# Altium PCB LoadMix.PcbDoc
Units mil, origin at the board's own origin, x right, y up, seen from the top; angles counter-clockwise.
Board outline 5010 x 5160 mil, 2 copper layers (Top Layer, Bottom Layer); 29 components, 11 nets, 56 pads, 0 vias.
Unrouted connection lines stored in the file: 5.
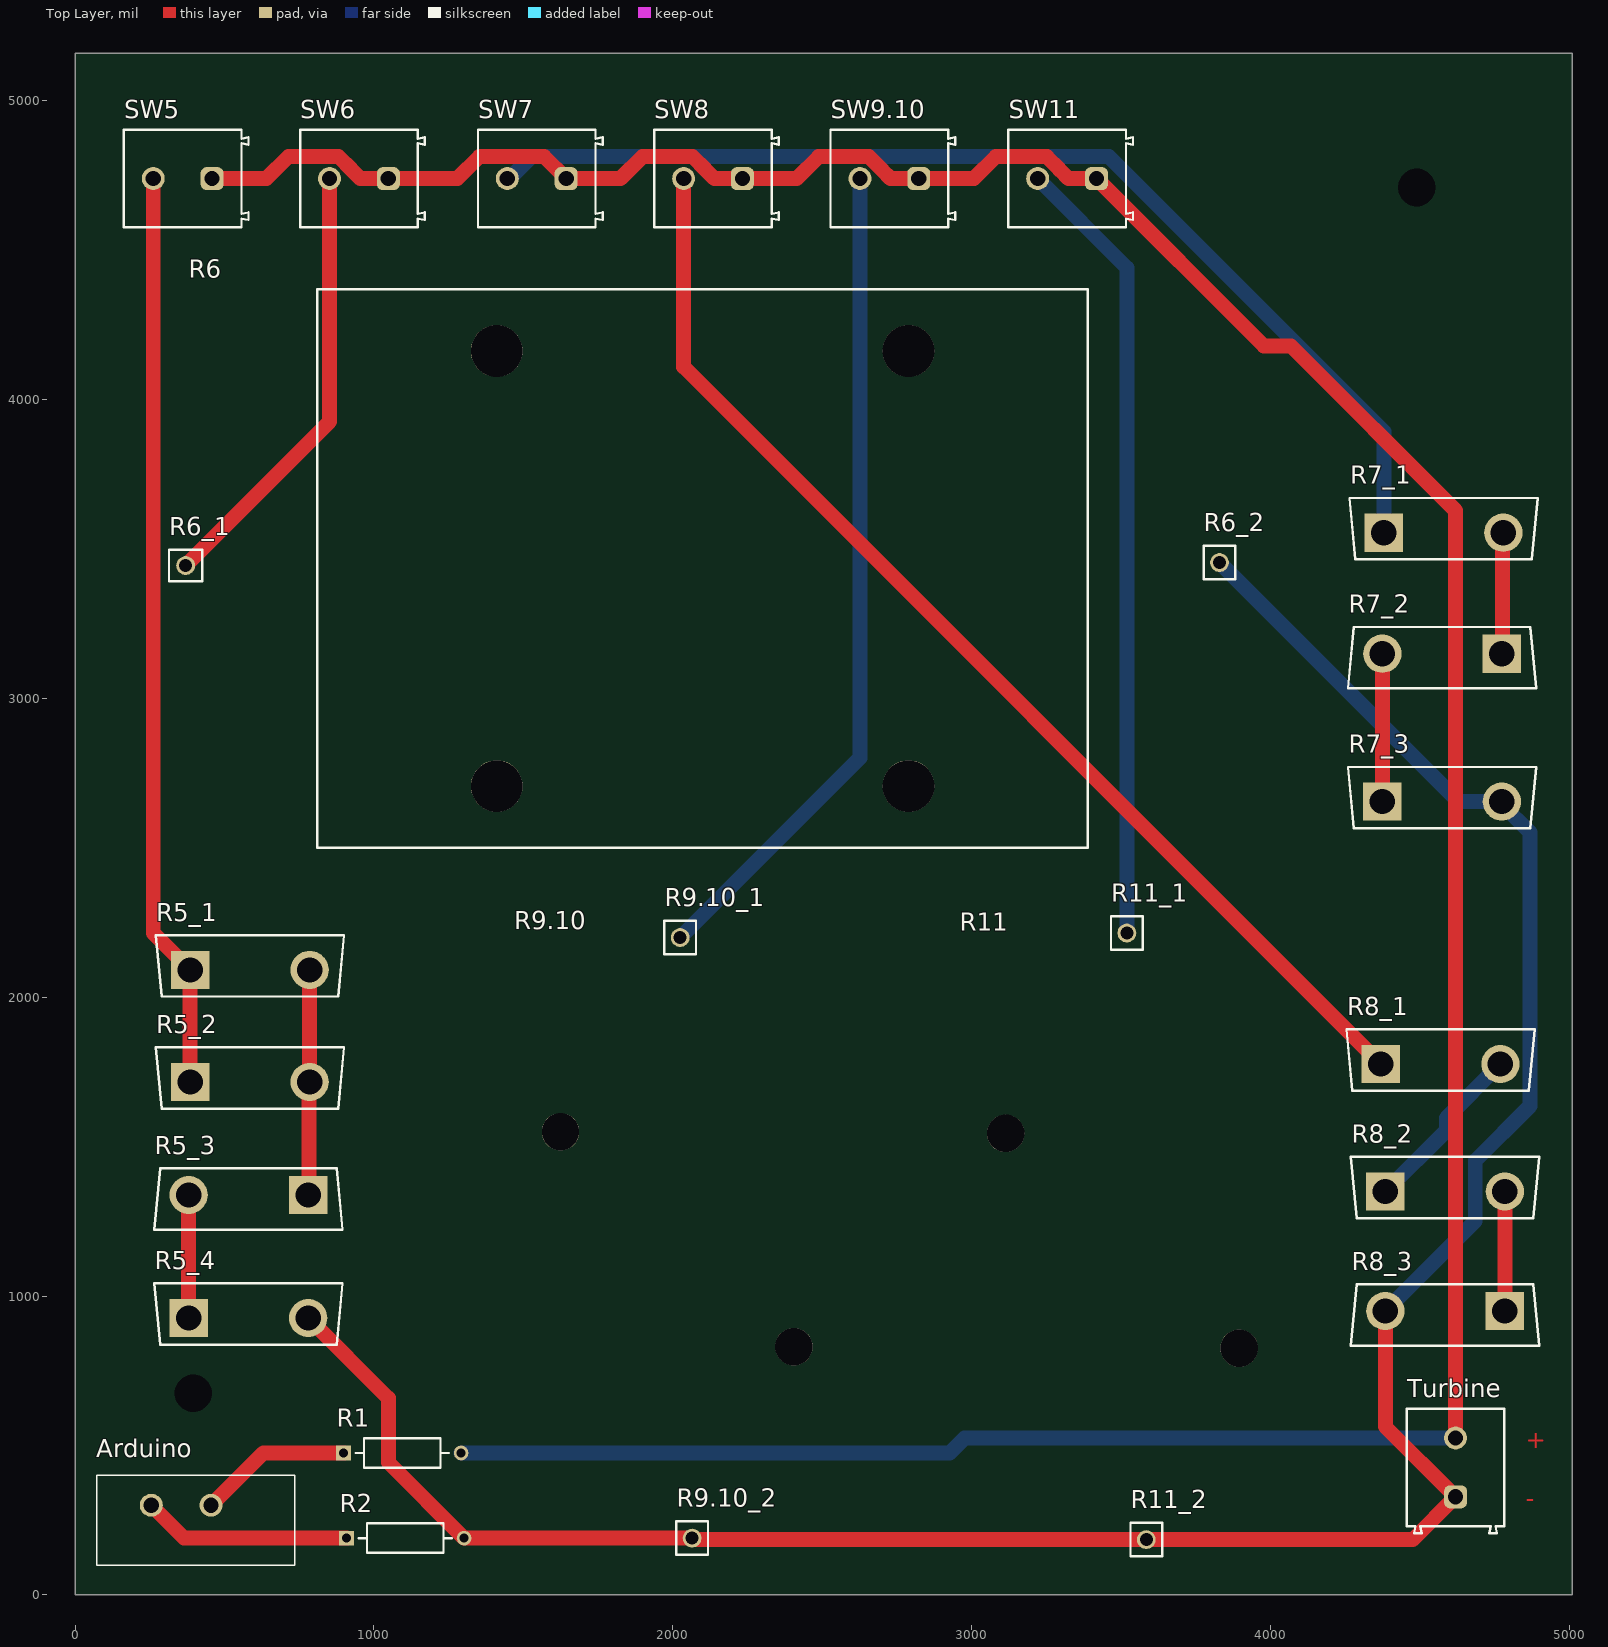
[diagram p0: Top Layer view]
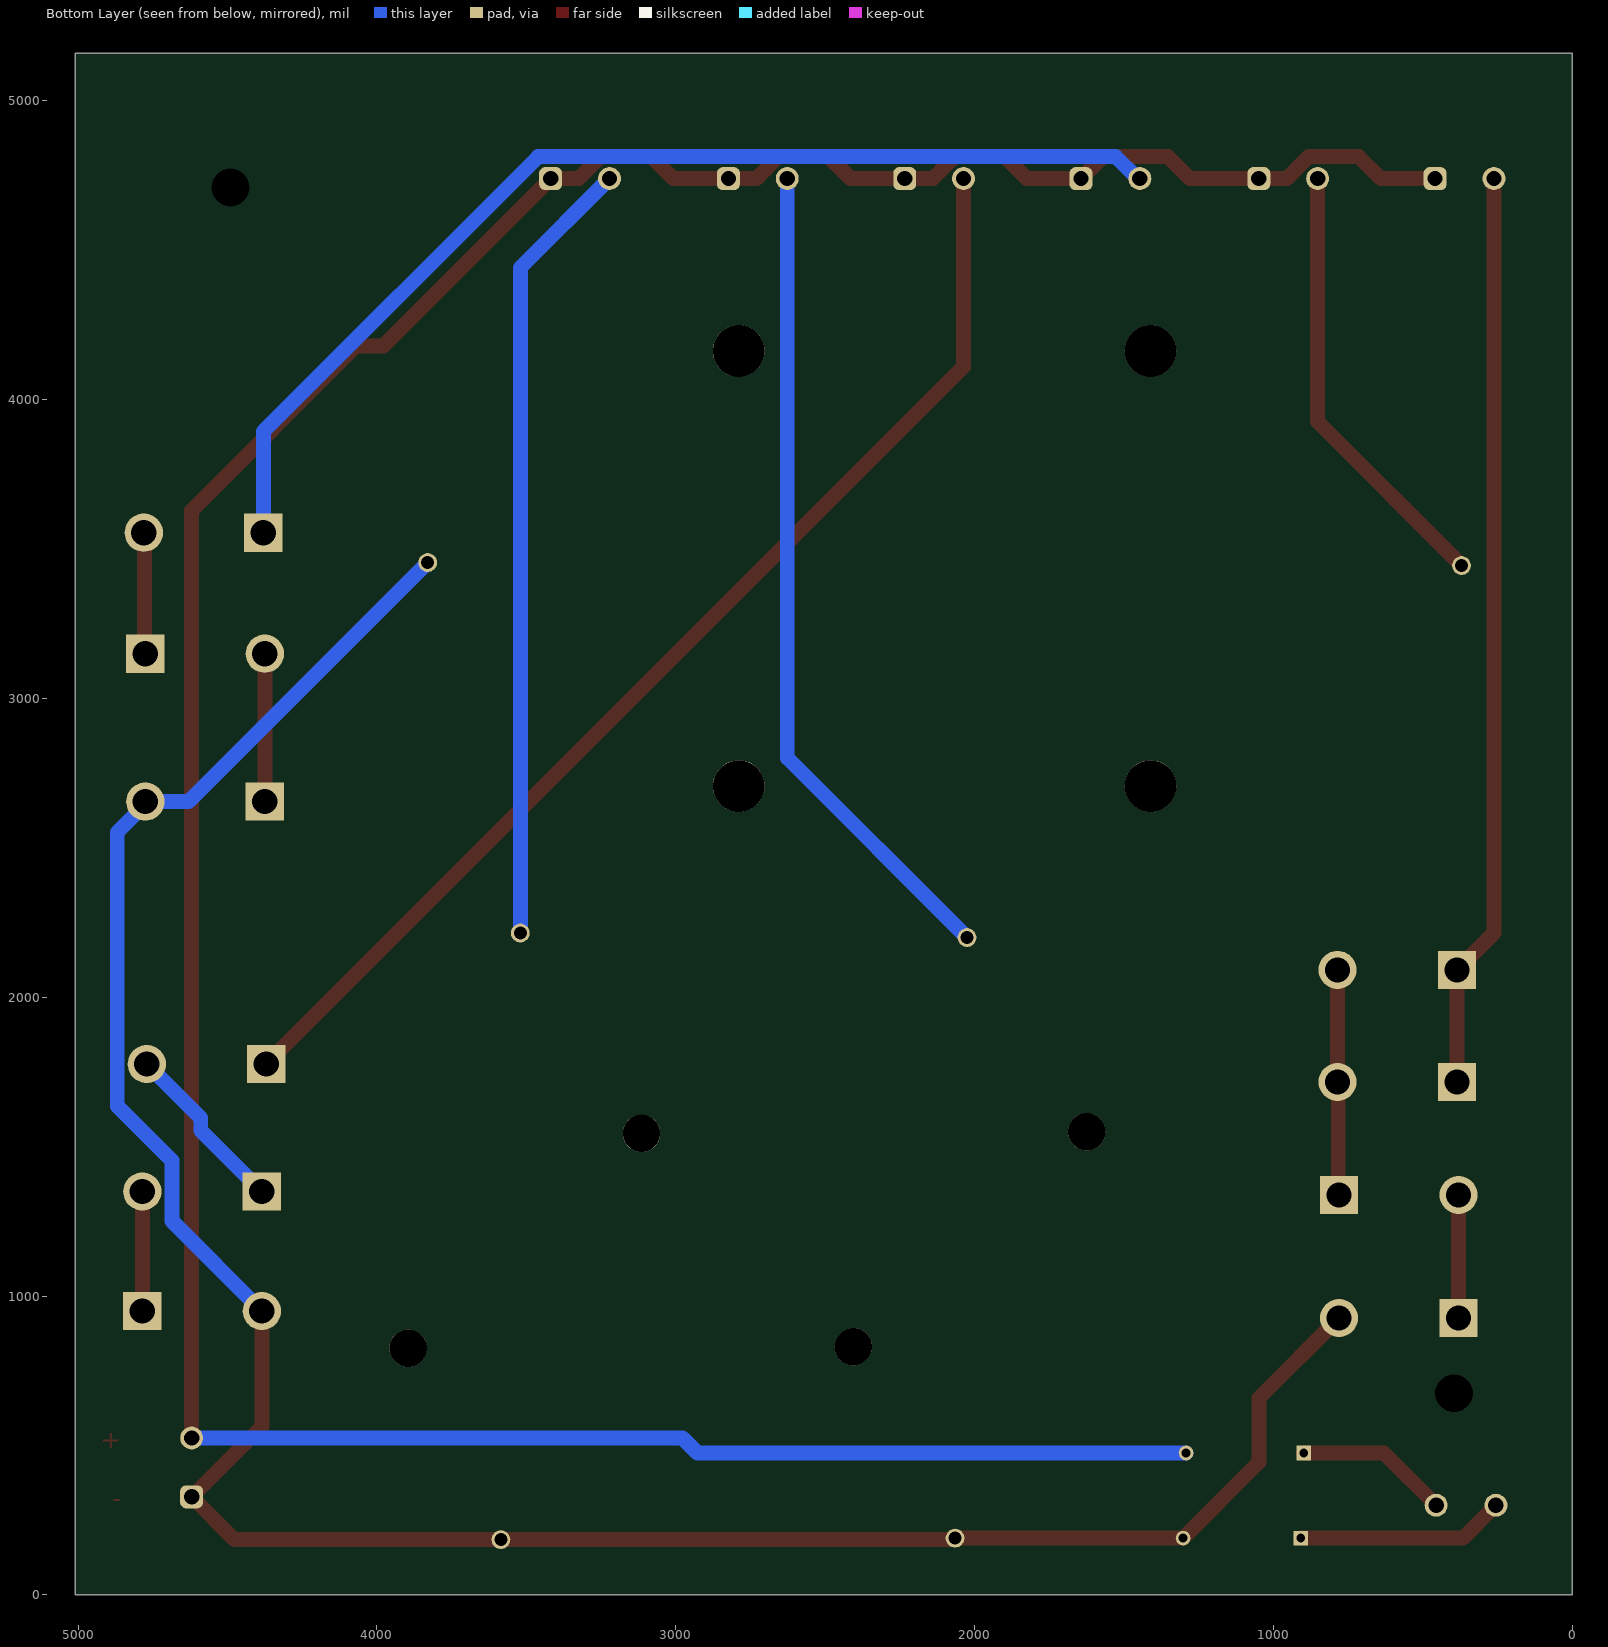
[diagram p1: Bottom Layer view, seen from below]
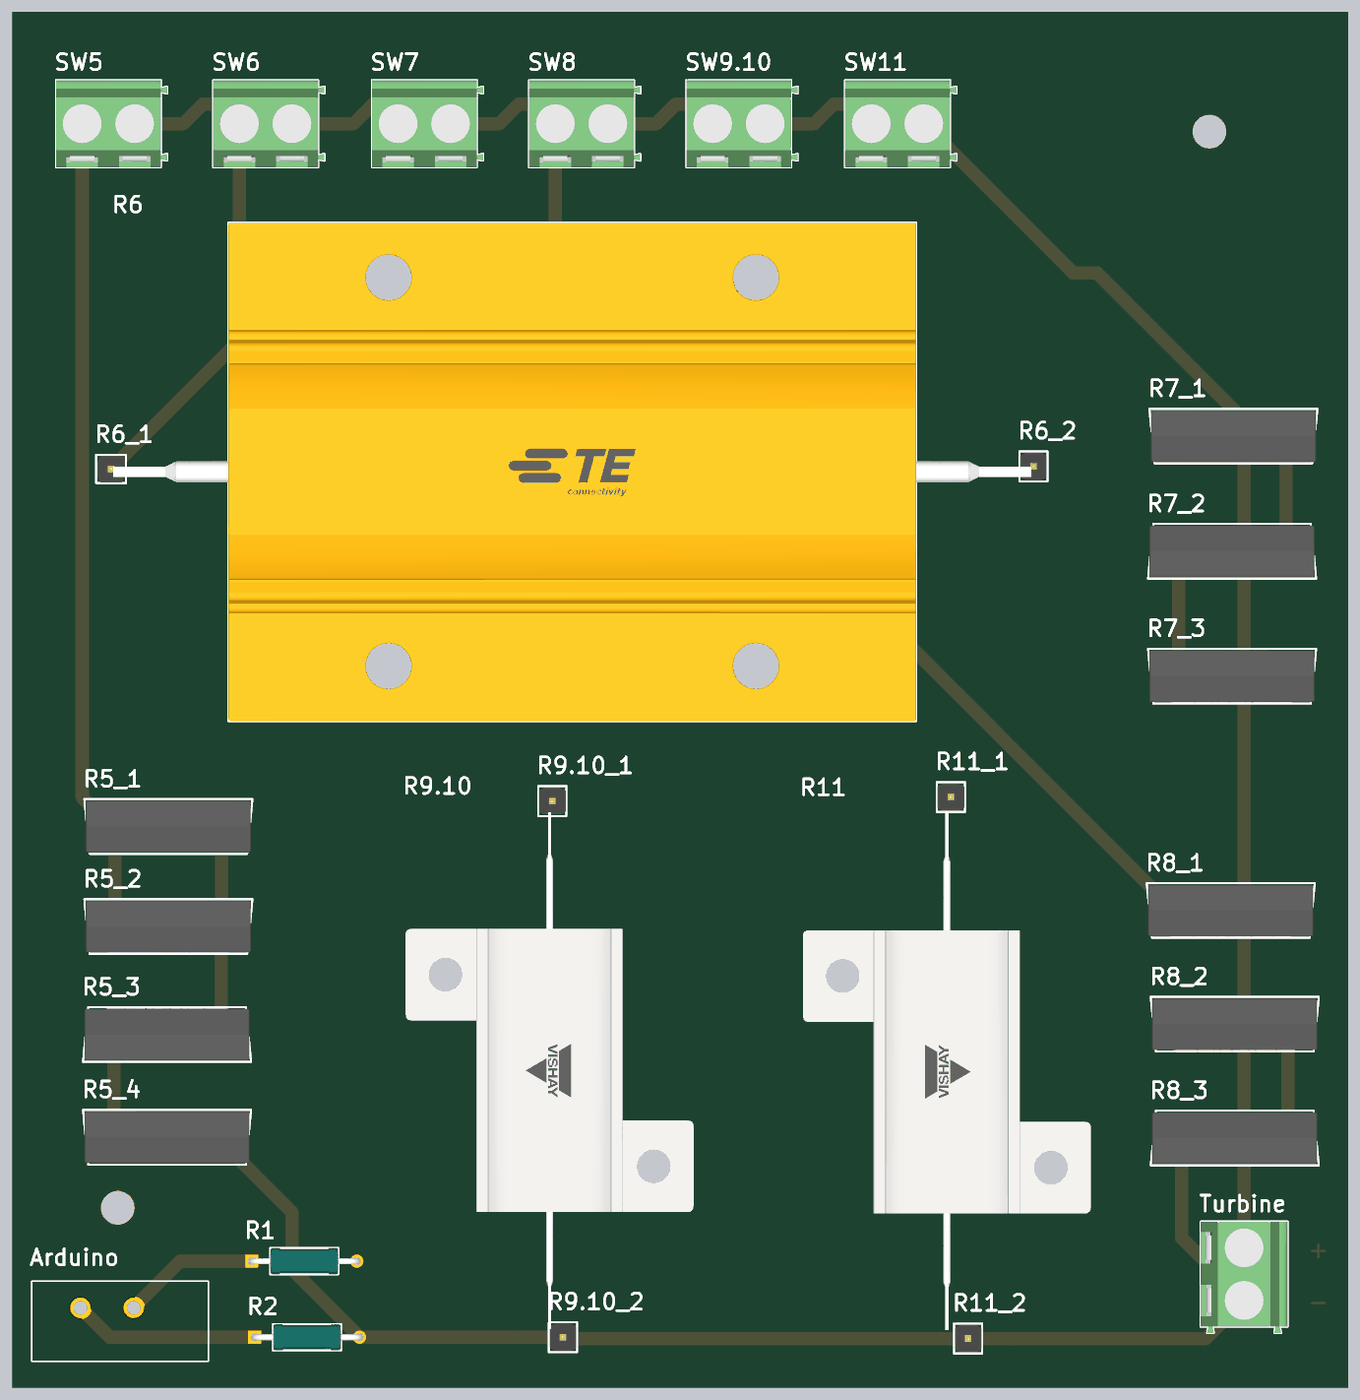
[diagram p2: 3D render of the assembled board from above, using the file's embedded part models]

## Layer stack, top to bottom
Top Solder: solder mask 0.4, Solder Resist, Dk 3.5
Top Layer: signal copper 1.4
Dielectric 1: dielectric 12.6, FR-4, Dk 4.8
Bottom Layer: signal copper 1.4
Bottom Solder: solder mask 0.4, Solder Resist, Dk 3.5

## Board outline
0,0 5010,0 5010,5160 0,5160

## Design rules (kind name [scope] priority, off if disabled: settings)
Clearance [All] p1: gap=10 ignorepadtopadclearanceinfootprint=FALSE
PolygonConnect [All] p1: connectstyle=Relief reliefconductorwidth=10 reliefentries=4 polygonreliefangle="90 Angle" airgapwidth=10
RoutingVias [All] p1: holewidth=28 width=50 viastyle="Through Hole" minholewidth=28 minwidth=50 maxholewidth=28 maxwidth=50
SolderMaskExpansion [All] p1: expansion=4 istentingtop=FALSE
Width [All] p1: maxlimit=60 minlimit=10 preferedwidth=50 minimp=50.000000 maximp=50.000000 favimp=50.000000
30 further rules are at their usual default settings.

## Components (designator, comment, footprint, x,y, rotation, side; value= is the part's Value field where it differs from the comment)
Arduino "1706730" PHOENIX_1706730 71.93,400 r270 top
R1 "" FP-MRS25-MFG 1095,475 r0 top
R2 "" FP-MRS25-MFG 1105,190 r0 top
R5_1 "TEH100M50R0FE" FP-TEH100-MFG 585,2105 r90 top
R5_2 "TEH100M50R0FE" FP-TEH100-MFG 585,1730 r90 top
R5_3 "TEH100M50R0FE" FP-TEH100-MFG 580,1325 r270 top
R5_4 "TEH100M50R0FE" FP-TEH100-MFG 580,940 r90 top
R6 "HSC10036RJ" FP-HSC10036RJ-MFG 2100,3435 r0 top
R6_1 "61300111121" 61300111121 370,3445 r0 top
R6_2 "61300111121" 61300111121 3830,3455 r90 top
R7_1 "TEH100M50R0FE" FP-TEH100-MFG 4580,3568.39 r90 top
R7_2 "TEH100M50R0FE" FP-TEH100-MFG 4575,3136.61 r270 top
R7_3 "TEH100M50R0FE" FP-TEH100-MFG 4575,2668.39 r90 top
R8_1 "TEH100M50R0FE" FP-TEH100-MFG 4570,1790 r90 top
R8_2 "TEH100M50R0FE" FP-TEH100-MFG 4585,1363.39 r90 top
R8_3 "TEH100M50R0FE" FP-TEH100-MFG 4585,936.61 r270 top
R9.10 "RE70G1201C02" FP-RE70G-MFG 2015,1190 r270 top
R9.10_1 "61300111121" 61300111121 2025,2200 r90 top
R9.10_2 "61300111121" 61300111121 2065,190 r90 top
R11 "RE70G1201C02" FP-RE70G-MFG 3505,1185 r90 top
R11_1 "61300111121" 61300111121 3520,2215 r90 top
R11_2 "61300111121" 61300111121 3585,185 r90 top
SW5 "691213710002" 691213710002 360,4740 r180 top
SW6 "691213710002" 691213710002 950,4740 r180 top
SW7 "691213710002" 691213710002 1545,4740 r180 top
SW8 "691213710002" 691213710002 2135,4740 r180 top
SW9.10 "691213710002" 691213710002 2725,4740 r180 top
SW11 "691213710002" 691213710002 3320,4740 r180 top
Turbine "691213710002" 691213710002 4620,426.58 r90 top

## Footprints (in the part's own frame and the unit in brackets; to place one, negate y for a bottom-side part, rotate by r counter-clockwise, add the part's x,y. Pads: shape width x height; smd on the part's side, far side on the other; paste and mask are expansions set on the pad)
61300111121 [mm] "Pin Header, pitch 2.54 mm, THT, Vertical, single row, 1p"
  round 1.6 hole 1.1: 1(0,0)
  silkscreen extent -1.42,-1.35 1.42,1.35, body extent -1.27,-1.27 1.27,1.27, height 8.57
691213710002 [mm] "5,00mm - modular - green - Horizontal entry with rising cage clamp -  10,0mm height - 02p"
  rrect50% 1.95x1.95 hole 1.3: 1(-2.5,0)
  round 1.95 hole 1.3: 2(2.5,0)
  silkscreen extent -5.6,-4.15 5,4.15, body extent -5.6,-4.15 5,4.15, height 10.05
FP-HSC10036RJ-MFG [mm]
  round 4.4 hole 4.4 unplated paste-2539.97 mask+0: ""(-17.5,-18.5) ""(-17.5,18.5) ""(17.5,-18.5) ""(17.5,18.5)
  silkscreen extent -32.75,-23.75 32.75,23.75, body extent -43.85,-23.85 43.85,23.85, height 0.25
FP-MRS25-MFG [mm]
  rect 1.25x1.25 hole 0.75 paste-2539.97 mask+0: 1(-5,0)
  round 1.25 hole 0.75 paste-2539.97 mask+0: 2(5,0)
  silkscreen extent -3.98,-1.25 3.98,1.25, body extent -5.72,-1.35 5.72,1.35, height 0.25
FP-RE70G-MFG [mm]
  round 3.18 hole 3.18 unplated paste-2539.97 mask+0: ""(-9.13,-9.92) ""(9.13,9.92)
  body extent -25.5,-14.01 25.5,14.01, height 0.25
FP-TEH100-MFG [mm]
  rect 3.25x3.25 hole 2.15 paste-2539.97 mask+0: 1(-0.34,5.08)
  round 3.25 hole 2.15 paste-2539.97 mask+0: 2(-0.34,-5.08)
  silkscreen extent -2.61,-8.01 2.61,8.01, body extent -2.71,-8.11 2.71,8.11, height 0.25
PHOENIX_1706730 [mm]
  round 1.95 hole 1.3: 1_1(2.54,9.73) 1_2(2.54,4.65)
  silkscreen extent 0,0 7.62,16.85

## Part data
Arduino: library part CMP-007-000000-1, Package=None, Availability=Unavailable, Component Type=Standard, Design Item ID=1706730, MF="{'manufacturer': u'Phoenix Contact'}", MP=1706730, Pin Count=2, Price=None, Source=1706730.SchLib
R1 R2: library part CMP-00030-42757237-1, "MRS25000C1000FRP00 Resistor, 100 Ohm, ± 1%, 600 mW, Axial Leaded, Metal Film (Thin Film), Professional", Case/Package=Axial, Max Operating Temperature=155°C, Max Power Dissipation=600mW, Min Operating Temperature=-55°C, Resistance=100Ω, Temperature Coefficient=50ppm/°C, Tolerance=1%, Voltage Rating=350V, Composition="Metal Film, Thin Film", Contact Plating=Tin, Diameter=2.5mm, Lead Diameter=600µm, Lead Free="Lead Free", Length=6.5mm, Military Standard=Not, Mount="Through Hole", NexarPartId=42757237, Number of Pins=2, Number of Terminations=2, Packaging="Tape & Reel (TR)", Power Rating=600mW, Radiation Hardening=No, REACH SVHC=Unknown, RoHS=Compliant, Schedule B="8533210090, 8533210090", Termination=Axial, Voltage Rating (DC)=350V, Width=2.5mm
R5_1 R5_2 R5_3 R5_4 R7_1 R7_2 R7_3 R8_1 R8_2 R8_3: library part CMP-00273-12698265-1, "TEH100M50R0FE Resistor, Thick Film, Res 50 Ohms, Pwr-Rtg100 W, Tol 1%, Radial, TO-247", Case/Package=TO-247, Max Operating Temperature=175°C, Max Power Dissipation=100W, Min Operating Temperature=25°C, Resistance=50Ω, Temperature Coefficient=50ppm/°C, Tolerance=1%, Voltage Rating=350V, Composition="Thick Film", Depth=5.21mm, Features="Moisture Resistant", Height=20.955mm, Lead Diameter=1.67mm, Lead Pitch=10.42mm, Length=15.748mm, Mount="Through Hole", NexarPartId=12698265, Number of Pins=2, Number of Terminations=2, Packaging=Bulk, Power Rating=100W, REACH SVHC=Unknown, RoHS=Compliant, Terminal Pitch=10.42mm, Termination=Radial, Voltage Rating (DC)=350V, Width=4.953mm
R6: library part CMP-03213-000002-1, "RES CHAS MNT 36 OHM 5% 100W", Number of Resistors=1, Package Quantity=10, Power Rating=100W, Resistance=36R, Resistor Type=Wirewound, Temperature Coefficient=50ppm/°C, Tolerance=5%, Voltage Rating=1.9kV, ELV=Compliant, Height=26mm, Lead/Base Style=Fixed, Length=65.5mm, Mount="Chassis Mount", Number of Terminations=2, Packaging=Tray, RoHS Compliant=Yes, Series=HSC, Termination=Solder, Voltage Rating (DC)=1.9kV, Width=47.5mm
R6_1 R6_2 R9.10_1 R9.10_2 R11_1 R11_2: library part CMP-1502-01058-3, Color=Black, Contact Resistance=20mΩ, Current Rating=3A, Operating Supply Voltage=250V, Connector Type="Male Pin", Contact Material=Copper, Contact Mating Length=5.9944mm, Contact Plating=Gold, Gender=Male, Lead Pitch=2.54mm, Mount="Through Hole", NexarPartId=32855518, Number of Contacts=1, Number of Pins=1, Number of Positions=1, Number of Rows=1, Orientation=Vertical, Packaging=Bulk, REACH SVHC=Unknown, RoHS=Compliant, Termination=Solder
R9.10 R11: library part CMP-00030-43962945-1, "RE70G1201C02 Res Wirewound 1.2K Ohm 1% 20W ±20ppm/C Aluminum Housed AXL Flange Mount Card", Max Operating Temperature=250°C, Min Operating Temperature=-55°C, Power Rating=20W, Resistance=1.2kΩ, Temperature Coefficient=20ppm/°C, Tolerance=1%, Composition=Wirewound, Height=13.87mm, Length=49.23mm, Military Standard=MIL-PRF-18546, NexarPartId=43962945, Packaging=Bulk, Radiation Hardening=No, RoHS=Compliant, Schedule B=8533210080, Width=27.43mm
SW5 SW6 SW7 SW8 SW9.10 SW11 Turbine: library part CMP-1502-02526-2, Color=Green, Current=10A, Max Operating Temperature=105°C, Min Operating Temperature=-40°C, Voltage=300V, Contact Material=Brass, Contact Plating=Tin, Current Rating=10A, Height=10mm, Housing Material=Nylon, Lead Pitch=5mm, Length=8.3mm, Mount="Through Hole", NexarPartId=8917718, Number of Contacts=2, Number of Levels=1, Number of Pins=2, Number of Positions Per Level=2, Packaging=Box, Pitch=5.0038mm, Plating="Brass, Steel", REACH SVHC=Unknown, RoHS=Compliant, Stripping Length=-7mm, Termination=Screw, Voltage Rating=300V, Width=10.6mm, Wire Gauge (Max)=26AWG, Wire Gauge (Min)=16AWG, Wire/Cable Gauge=26AWG

## Free pads (board coordinates)
  round 60 hole 125.98: 2(4490,4710) 3(395,675)

## Nets (pads, with @x,y where several pads share a name; then routed paths per layer and width w, separated by ;. In a path a pad name is that pad's centre, name@x,y a point inside that pad or via, vN(x,y) a via of type N, cw(c..) or ccw(c..) an arc to the next point about the centre after c; other vN are vias at no path point)
COM: R5_1.1 R5_2.1 R6_1.1 R7_1.1 R8_1.1 R9.10_1.1 R11_1.1 SW5.2 SW6.2 SW7.2 SW8.2 SW9.10.2 SW11.2 | length 17620
  Top Layer w50: SW5.2 261.58,2215.04 R5_1.1 R5_2.1 ; R6_1.1 851.58,3926.57 SW6.2 ; SW8.2 2036.57,4110.04 R8_1.1
  Bottom Layer w50: SW7.2 1453.82,4740 1527.21,4813.39 3460.07,4813.39 4380,3893.45 R7_1.1 ; R9.10_1.1 2626.57,2801.57 SW9.10.2 ; SW11.2 3520,4441.57 R11_1.1
GND: R2.2 R5_4.2 R6_2.1 R7_3.2 R8_3.2 R9.10_2.1 R11_2.1 Turbine.1 | length 8272.2
  Top Layer w50: R5_4.2 1048.38,658.23 1048.38,443.47 R2.2 R9.10_2.1 2067.49,187.51 2076.67,187.51 2079.19,185 R11_2.1 4476.85,185 Turbine.1 4385,563.15 R8_3.2
  Bottom Layer w50: R6_2.1 4630,2655 R7_3.2 4775,2646.41 4868.98,2552.43 4868.98,1636.34 4686.02,1453.39 4686.02,1251.02 R8_3.2
NetArduino_1_1: Arduino.1_1 R1.1 | length 515.6
  Top Layer w50: Arduino.1_1 630,475 R1.1
NetArduino_1_2: Arduino.1_2 R2.1 | length 698.7
  Top Layer w50: Arduino.1_2 365,190 R2.1
NetR5_1_2: R5_1.2 R5_2.2 R5_3.1 | length 755.3
  Top Layer w50: R5_3.1 782.5,1340.89 782.5,1714.11 R5_2.2 R5_1.2
NetR5_3_2: R5_3.2 R5_4.1 | length 411.8
  Top Layer w50: R5_4.1 R5_3.2
NetR7_1_2: R7_1.2 R7_2.1 | length 407.1
  Top Layer w50: R7_2.1 4777.5,3152.5 4777.5,3552.5 R7_1.2
NetR7_2_2: R7_2.2 R7_3.1 | length 495
  Top Layer w50: R7_3.1 R7_2.2
NetR8_1_2: R8_1.2 R8_2.1 | length 586.1
  Bottom Layer w50: R8_2.1 4589.53,1554.53 4589.53,1596.14 R8_1.2
NetR8_2_2: R8_2.2 R8_3.1 | length 400
  Top Layer w50: R8_3.1 R8_2.2
NO: R1.2 SW5.1 SW6.1 SW7.1 SW8.1 SW9.10.1 SW11.1 Turbine.2 | length 11381.2
  Top Layer w50: SW5.1 640.2,4740 713.58,4813.39 881.97,4813.39 924.96,4770.4 924.96,4769.29 954.25,4740 SW6.1 1279.23,4740 1352.62,4813.39 1570.04,4813.39 SW7.1 1825.2,4740 1898.58,4813.39 2066.97,4813.39 2109.96,4770.4 2109.96,4769.29 2139.25,4740 SW8.1 2415.2,4740 2488.58,4813.39 2656.97,4813.39 2699.96,4770.4 2699.96,4769.29 2729.25,4740 SW9.10.1 3007.7,4740 3081.08,4813.39 3251.97,4813.39 3294.96,4770.4 3294.96,4769.29 3324.25,4740 SW11.1 3978.02,4180.4 4068.66,4180.4 4620,3629.06 Turbine.2
  Bottom Layer w50: R1.2 2927.3,475 2977.3,525 Turbine.2
pads on no net: R6. R9.10. R11.

## Other copper
Top Layer:
  text "+" at 4855,490 h60
  text "-" at 4855,295.01 h60